# Altium PCB Juno_Light_Driver-Reference.PcbDoc
Units mm, origin at the board's own origin, x right, y up, seen from the top; angles counter-clockwise.
Board outline 60 x 60 mm, 2 copper layers (Top Layer, Bottom Layer); 29 components, 61 nets, 191 pads, 12 vias.
Unrouted connection lines stored in the file: 130.
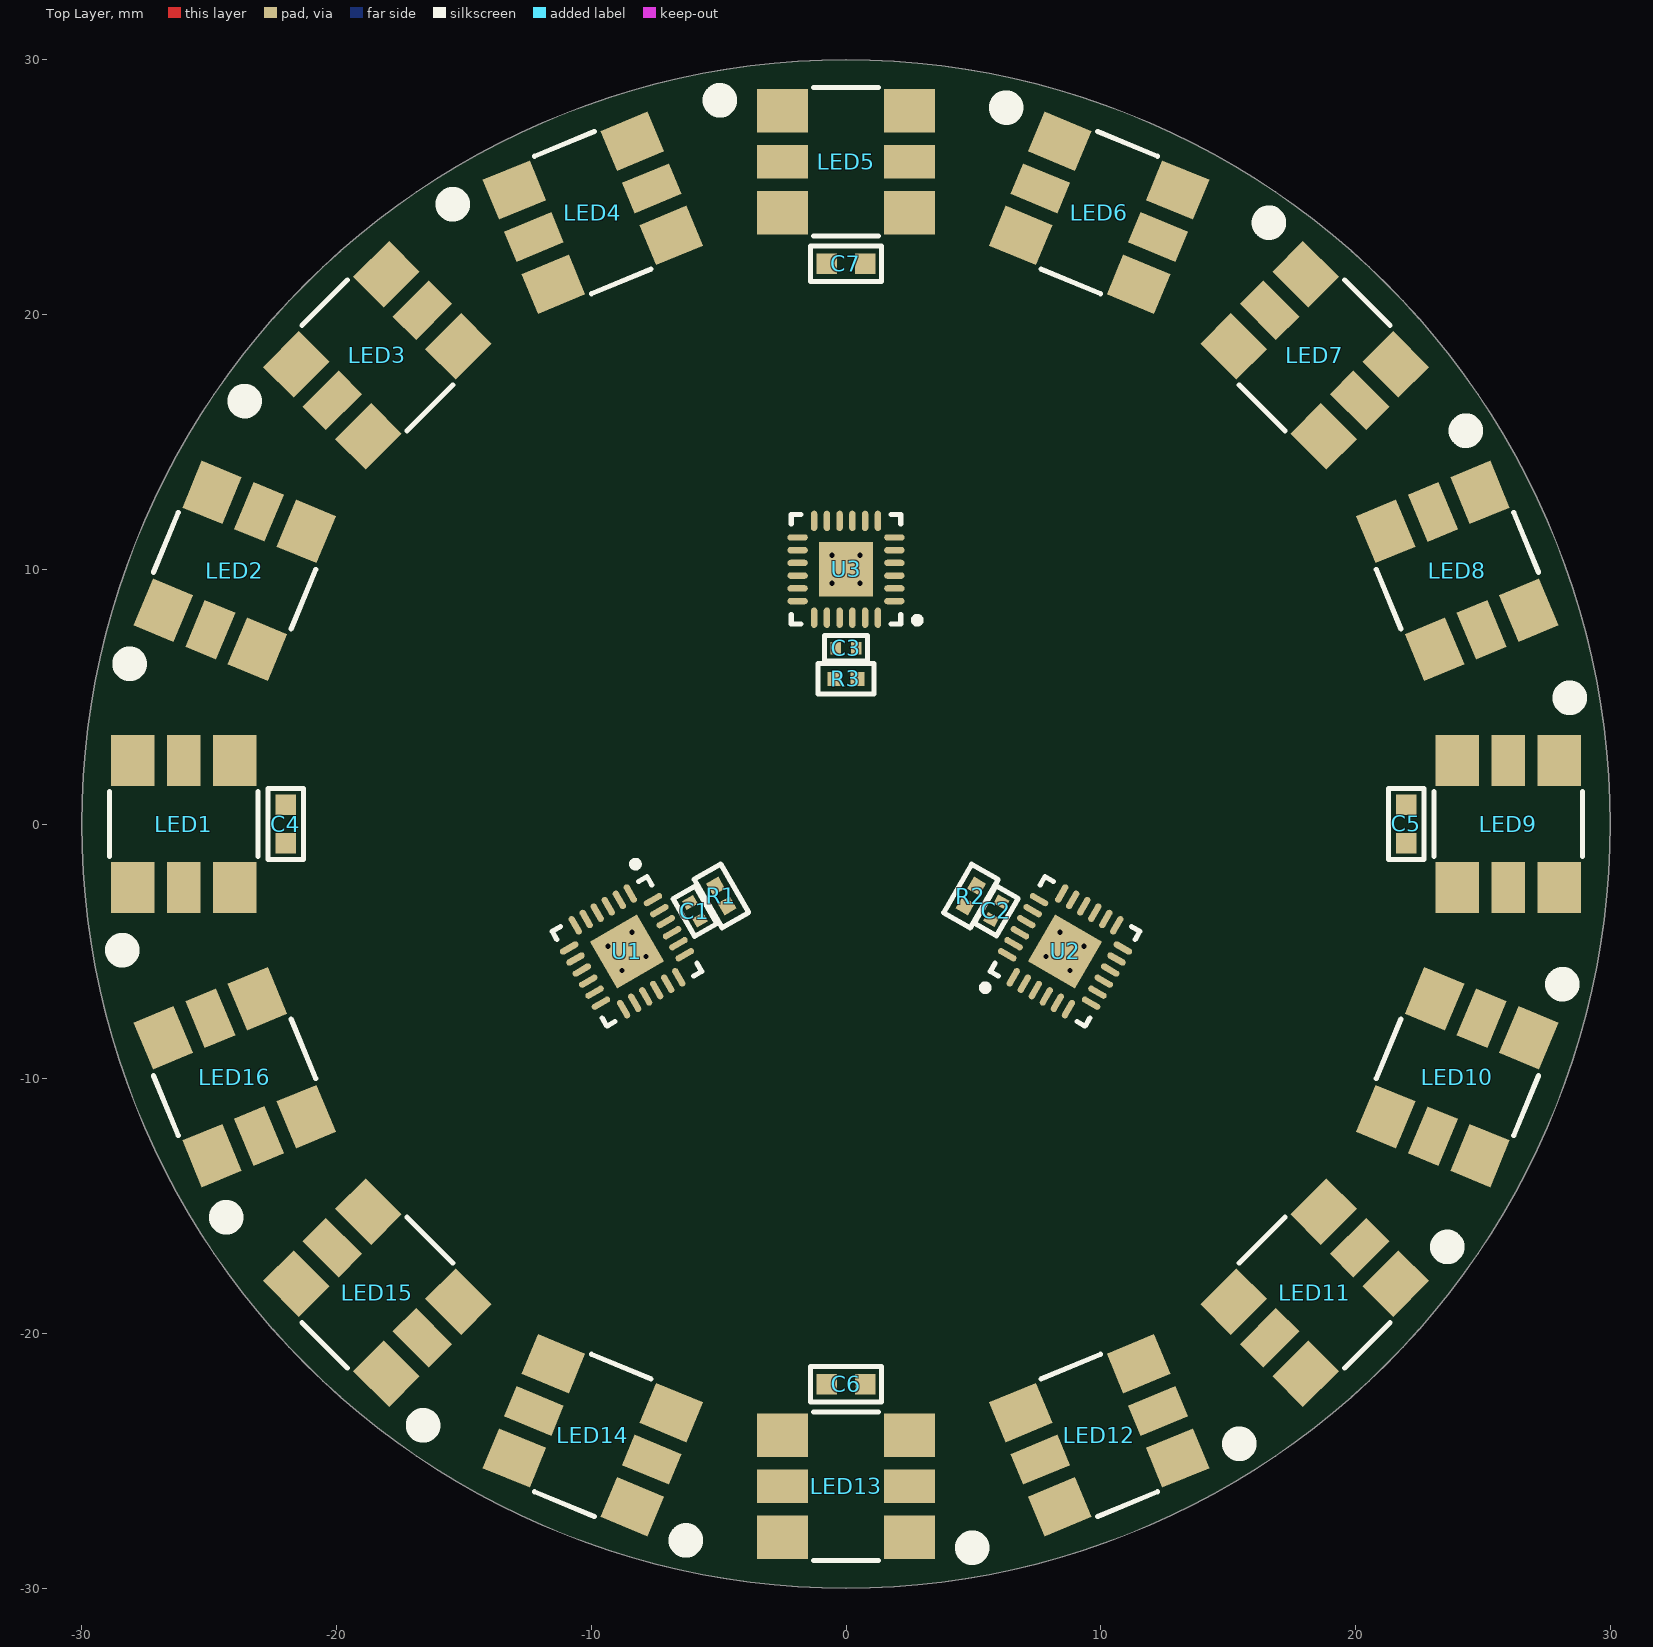
[diagram p0: Top Layer view]
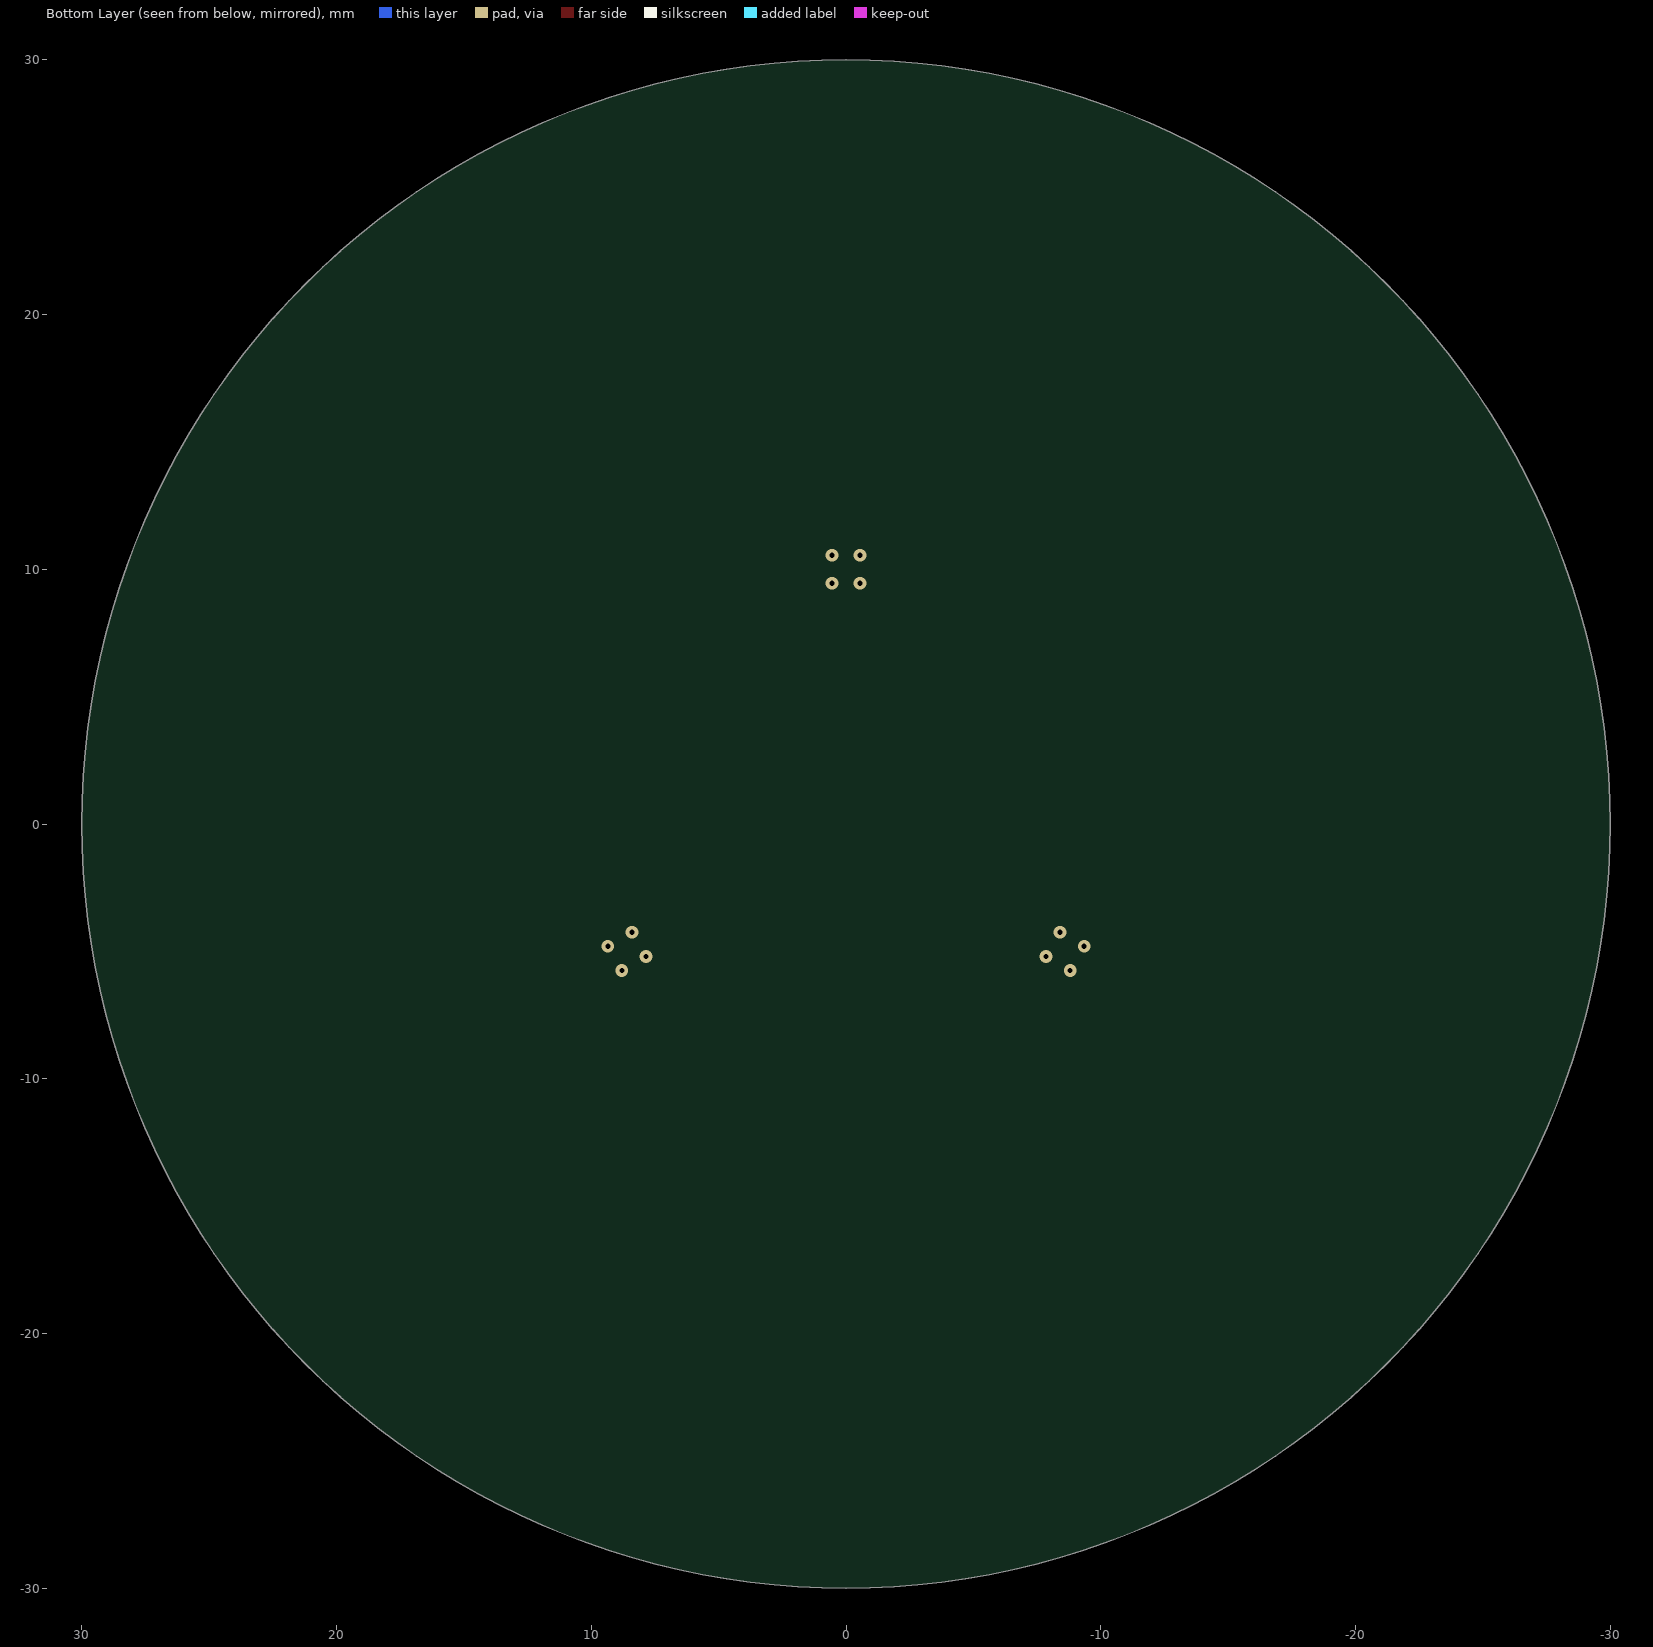
[diagram p1: Bottom Layer view, seen from below]

## Layer stack, top to bottom
Top Solder: solder mask 0.0102, Solder Resist, Dk 3.5
Top Layer: signal copper 0.0356
Dielectric 1: dielectric 0.32, FR-4, Dk 4.8
Bottom Layer: signal copper 0.0356
Bottom Solder: solder mask 0.0102, Solder Resist, Dk 3.5

## Board outline
-30,0 ccw(c0,0) 0,-30 ccw(c0,0) 30,0 ccw(c0,0) 0,30 ccw(c0,0)

## Design rules (kind name [scope] priority, off if disabled: settings)
Clearance [All] p1: gap=0.152 ignorepadtopadclearanceinfootprint=FALSE except(0: Arc-Hole Track-Hole SMDPad-Hole THPad-Hole Via-Hole Fill-Hole Poly-Hole Region-Hole Text-Hole)
MinimumSolderMaskSliver [All] p1 off: minsoldermaskwidth=0.254
PolygonConnect [All] p1: connectstyle=Direct reliefconductorwidth=0.254 reliefentries=4 polygonreliefangle="90 Angle" airgapwidth=0.254
RoutingVias [All] p1: holewidth=0.711 width=1.27 viastyle="Through Hole" minholewidth=0.2 minwidth=0.45 maxholewidth=0.711 maxwidth=1.27
SilkToSilkClearance [All] p1 off: silktosilkclearance=0.254
SilkToSolderMaskClearance [IsPad] p1 off: minsilkscreentomaskgap=0.254 clearancetoexposedcopper=TRUE
SolderMaskExpansion [All] p1: expansion=0.102
Width [All] p1: maxlimit=5.08 minlimit=0.152 preferedwidth=0.254 minimp=50.000000 maximp=50.000000 favimp=50.000000
27 further rules are at their usual default settings.

## Classes and differential pairs
component class "[02] - TRICOLOR LEDS": C4 C5 C6 LED1 LED2 LED3 LED4 LED5 LED6 LED7 LED8 LED9 LED10 LED11 LED12 LED13 LED14 LED15 LED16
component class "[01] - LED DRIVER": C1 C2 C3 R1 R2 R3 U1 U2 U3

## Components (designator, comment, footprint, x,y, rotation, side; value= is the part's Value field where it differs from the comment)
C1 "0.1uF" C0402 -5.932,-3.425 r120 top
C2 "0.1uF" C0402 5.9,-3.406 r240 top
C3 "0.1uF" C0402 0,6.9 r0 top
C4 "10uF" C0603 -22,0 r270 top
C5 "10uF" C0603 22,0 r90 top
C6 "10uF" C0603 0,-22 r0 top
C7 "10uF" C0603 0,22 r180 top
LED1 "SLV6A-FKB-CK1P1G1BB7R3R3" "CREE SLV6A-FKB" -26,0 r90 top
LED2 "SLV6A-FKB-CK1P1G1BB7R3R3" "CREE SLV6A-FKB" -24,9.941 r67.5 top
LED3 "SLV6A-FKB-CK1P1G1BB7R3R3" "CREE SLV6A-FKB" -18.4,18.4 r45 top
LED4 "SLV6A-FKB-CK1P1G1BB7R3R3" "CREE SLV6A-FKB" -9.941,24 r22.5 top
LED5 "SLV6A-FKB-CK1P1G1BB7R3R3" "CREE SLV6A-FKB" 0,26 r0 top
LED6 "SLV6A-FKB-CK1P1G1BB7R3R3" "CREE SLV6A-FKB" 9.941,24 r337.5 top
LED7 "SLV6A-FKB-CK1P1G1BB7R3R3" "CREE SLV6A-FKB" 18.4,18.4 r315 top
LED8 "SLV6A-FKB-CK1P1G1BB7R3R3" "CREE SLV6A-FKB" 24,9.941 r292.5 top
LED9 "SLV6A-FKB-CK1P1G1BB7R3R3" "CREE SLV6A-FKB" 26,0 r270 top
LED10 "SLV6A-FKB-CK1P1G1BB7R3R3" "CREE SLV6A-FKB" 24,-9.941 r247.5 top
LED11 "SLV6A-FKB-CK1P1G1BB7R3R3" "CREE SLV6A-FKB" 18.4,-18.4 r225 top
LED12 "SLV6A-FKB-CK1P1G1BB7R3R3" "CREE SLV6A-FKB" 9.941,-24 r202.5 top
LED13 "SLV6A-FKB-CK1P1G1BB7R3R3" "CREE SLV6A-FKB" 0,-26 r180 top
LED14 "SLV6A-FKB-CK1P1G1BB7R3R3" "CREE SLV6A-FKB" -9.941,-24 r157.5 top
LED15 "SLV6A-FKB-CK1P1G1BB7R3R3" "CREE SLV6A-FKB" -18.4,-18.4 r135 top
LED16 "SLV6A-FKB-CK1P1G1BB7R3R3" "CREE SLV6A-FKB" -24,-9.941 r112.5 top
R1 "18K" R0402 -4.893,-2.825 r300 top
R2 "18K" R0402 4.9,-2.829 r60 top
R3 "18K" R0402 0,5.7 r180 top
U1 "LED1642GWQTR" QFN24 -8.6,-5 r300 top
U2 "LED1642GWQTR" QFN24 8.6,-5 r60 top
U3 "LED1642GWQTR" QFN24 0,10 r180 top

## Footprints (in the part's own frame and the unit in brackets; to place one, negate y for a bottom-side part, rotate by r counter-clockwise, add the part's x,y. Pads: shape width x height; smd on the part's side, far side on the other; paste and mask are expansions set on the pad)
C0402 [mm] "Chip Capacitor, 2-Leads, Body 1.00x0.50mm, IPC Medium Density"
  rect 0.4x0.5 smd: 1(-0.4,0) 2(0.4,0)
  silkscreen extent -0.85,-0.5 0.85,0.5, body extent -0.52,-0.28 0.52,0.28, height 0.55
C0603 [mm] "Chip Capacitor, 2-Leads, Body 1.60x0.80mm, IPC Medium Density"
  rect 0.8x0.8 smd: 1(-0.75,0) 2(0.75,0)
  silkscreen extent -1.4,-0.7 1.4,0.7, body extent -0.85,-0.45 0.85,0.45, height 0.9
"CREE SLV6A-FKB" [mm]
  rect 2x1.7 smd: 1(-2.5,2) 3(-2.5,-2) 4(2.5,-2) 6(2.5,2)
  rect 2x1.3 smd: 2(-2.5,0) 5(2.5,0)
  silkscreen extent -5.13,-2.92 1.27,2.92, body extent -2.8,-2.8 2.8,2.8, height 2.6
QFN24 [mm] "QFN, 24-Leads, Body 3.93x3.93mm, Pitch 0.50mm, Thermal Pad 2.13x2.13mm, IPC High Density"
  oval 0.8x0.25 smd: 1(-1.9,1.25) 2(-1.9,0.75) 3(-1.9,0.25) 4(-1.9,-0.25) 5(-1.9,-0.75) 6(-1.9,-1.25) 13(1.9,-1.25) 14(1.9,-0.75) 15(1.9,-0.25) 16(1.9,0.25) 17(1.9,0.75) 18(1.9,1.25)
  oval 0.25x0.8 smd: 7(-1.25,-1.9) 8(-0.75,-1.9) 9(-0.25,-1.9) 10(0.25,-1.9) 11(0.75,-1.9) 12(1.25,-1.9) 19(1.25,1.9) 20(0.75,1.9) 21(0.25,1.9) 22(-0.25,1.9) 23(-0.75,1.9) 24(-1.25,1.9)
  rect 2.13x2.13 smd: 25(0,0)
  silkscreen extent -2.92,-2.15 2.15,2.15, body extent -2.05,-2.05 2.05,2.05, height 1
R0402 [mm] "Chip Resistor, 2-Leads, Body 1.00x0.50mm, IPC Medium Density"
  rect 0.55x0.55 smd: 1(-0.45,0) 2(0.45,0)
  silkscreen extent -1.1,-0.6 1.1,0.6, body extent -0.52,-0.28 0.52,0.28, height 0.4

## Part data
C1 C2 C3: library part CL05B104KO5NNNC, "Cap Ceramic 0.1uF 16V X7R 10% SMD 0402 125C C/T", Capacitance=100nF, Case/Package=0402, Case Code (Metric)=1005, Dielectric=X7R, Manufacturer 1=Samsung, Max Operating Temperature=125°C, Min Operating Temperature=-55°C, Package Quantity=1, Supplier Part Number 1=1276-1001-6-ND, Tolerance=10%, Voltage=16V, Case Code (Imperial)=0402, ComponentLink1Description=https://datasheet.ciiva.com/16208/cl05b104kq5nnnc-16208343.pdf, ComponentLink1URL=https://datasheet.ciiva.com/16208/cl05b104kq5nnnc-16208343.pdf, ComponentLink2Description=https://datasheet.ciiva.com/26920/getdatasheetpartid-359683-26920169.pdf, ComponentLink2URL=https://datasheet.ciiva.com/26920/getdatasheetpartid-359683-26920169.pdf, ComponentLink3Description=https://datasheet.ciiva.com/26309/mlcc-catalogdownload2013-eng-26309003.pdf, ComponentLink3URL=https://datasheet.ciiva.com/26309/mlcc-catalogdownload2013-eng-26309003.pdf, ComponentLink4Description=https://datasheet.ciiva.com/29198/458718-da-01-en-vs-kondensator-0402-29198423.pdf, ComponentLink4URL=https://datasheet.ciiva.com/29198/458718-da-01-en-vs-kondensator-0402-29198423.pdf, Contact Plating=Tin, Depth=0.5mm, Description 1="Cap Ceramic 0.1uF 16V X7R 10% SMD 0402 125C Paper T/R", Height=0.5mm, Lead Free="Lead Free", Length=1mm, Manufacturer Part Number 1=CL05B104KO5NNNC, Material=Ceramic, Mount="Surface Mount", Packaging="Tape and Reel", Pricing 1="1=0.1, 10=0.018, 100=0.0081, 500=0.0058, 1000=0.0045, 2500=0.0041, 5000=0.0038 (USD)", Radiation Hardening=No, Stock 1=9531, Supplier 1=Digi-Key, Thickness=0.022inch, Voltage Rating=16V, Voltage Rating (DC)=16V, Width=0.02inch
C4 C5 C6 C7: library part GRM188R61A106KE69D, "Cap Ceramic 10uF 10V X5R 10% SMD 0603 85C Paper T/R", Case/Package=0603, Case Code (Metric)=1608, Dielectric=X5R, Manufacturer=Murata, Max Operating Temperature=85°C, Min Operating Temperature=-55°C, Supplier Part Number 1=490-10474-1-ND, Tolerance=10%, Voltage=10V, Capacitance=10uF, Case Code (Imperial)=0603, Depth=0.8mm, Description 1="Cap Ceramic 10uF 10V X5R 10% SMD 0603 85C Paper T/R", Height=0.8mm, Lead Free="Lead Free", Length=1.6mm, Manufacturer Part Number 1=GRM188R61A106KE69D, Mount="Surface Mount", Packaging="Tape and Reel", Pricing="1=0.22, 10=0.149, 100=0.0754, 500=0.05158, 1000=0.04563 (USD)", REACH SVHC="No SVHC", Stock=40000, Supplier 1=Digi-Key, Thickness=0.037inch, Voltage Rating=10V, Voltage Rating (DC)=10V, Width=0.031inch
LED1 LED2 LED3 LED4 LED5 LED6 LED7 LED8 LED9 LED10 LED11 LED12 LED13 LED14 LED15 LED16: "LED RGB 6PLCC SMD", Case/Package=SMD/SMT, Color=Blue,Green,Red, Forward Voltage=3.2V, Manufacturer=Cree, Supplier Part Number 1=SLV6A-FKB-CK1P1G1BB7R3R3CT-ND, Test Current=20mA, Dominant Wavelength=470nm, Height=2.6mm, Length=5.5mm, Luminous Intensity=420mcd, Manufacturer Part Number=SLV6A-FKB-CK1P1G1BB7R3R3, Mount="Surface Mount", Packaging="Tape and Reel", Pricing 1="1=0.42, 10=0.395, 100=0.3648, 1000=0.32631 (USD)", Stock 1=101474, Supplier 1=Digi-Key, Width=5.3mm
R1 R2 R3: library part CRGCQ0402F18K, Manufacturer="TE Connectivity", Supplier Part Number 1=A129642CT-ND, Manufacturer Part Number=CRGCQ0402F18K, Pricing 1="1=0.1, 10=0.022, 100=0.009, 1000=0.00406, 2500=0.00352, 5000=0.00291 (USD)", Stock 1=128806, Supplier 1=Digi-Key
U1 U2 U3: "IC LED DRIVER LIN DIM 40MA 24QFN", Case/Package=QFN, Frequency=30MHz, Manufacturer=STMicroelectronics, Max Input Voltage=5.5V, Max Operating Temperature=85°C, Max Output Current=50mA, Max Output Voltage=19V, Max Supply Current=10mA, Min Input Voltage=3V, Min Operating Temperature=-40°C, Nominal Input Voltage (DC)=3.3V, Output Current per Channel=40mA, Package Quantity=4000, Supplier Part Number 1=497-14029-1-ND, ComponentLink1Description=http://www.st.com/content/ccc/resource/technical/document/datasheet/ae/9b/e2/7c/7d/66/41/08/DM00080246.pdf/files/DM00080246.pdf/jcr:content/translations/en.DM00080246.pdf?src-supplier=Digi-Key, ComponentLink1URL=http://www.st.com/content/ccc/resource/technical/document/datasheet/ae/9b/e2/7c/7d/66/41/08/DM00080246.pdf/files/DM00080246.pdf/jcr:content/translations/en.DM00080246.pdf?src-supplier=Digi-Key, ComponentLink2Description=https://www.verical.com/server-webapp/html/getDatasheet?partID=789956&src-supplier=Verical, ComponentLink2URL=https://www.verical.com/server-webapp/html/getDatasheet?partID=789956&src-supplier=Verical, ComponentLink3Description=http://www.st.com/web/en/resource/technical/document/datasheet/DM00080246.pdf?src-supplier=Avnet, ComponentLink3URL=http://www.st.com/web/en/resource/technical/document/datasheet/DM00080246.pdf?src-supplier=Avnet, Dimming=PWM, Height=0.95mm, Lead Free="Lead Free", Length=4.15mm, Manufacturer Part Number=LED1642GWQTR, Max Input Voltage (DC)=5.5V, Max Supply Voltage=5.5V, Min Input Voltage (DC)=3V, Min Supply Voltage=3V, Mount="Surface Mount", Nominal Supply Current=10mA, Number of Channels=16, Number of Outputs=16, Number of Pins=24, Operating Supply Voltage=3.3V, Output Current=50mA, Output Voltage=19V, Packaging="Tape and Reel", Pricing 1="1=2.1, 10=1.883, 100=1.5138, 500=1.24372, 1000=1.03052 (USD)", Radiation Hardening=No, REACH SVHC="No SVHC", Stock 1=43999, Supplier 1=Digi-Key, Switching Frequency=30MHz, Width=4.15mm

## Via types
v1: diameter 0.5, hole 0.2, Top Layer to Bottom Layer, 12 vias

## Nets (pads, with @x,y where several pads share a name; then routed paths per layer and width w, separated by ;. In a path a pad name is that pad's centre, name@x,y a point inside that pad or via, vN(x,y) a via of type N, cw(c..) or ccw(c..) an arc to the next point about the centre after c; other vN are vias at no path point)
+3V3: C1.1 C2.1 C3.1 U1.21 U2.21 U3.21
+VBATT: C4.1 C5.1 C6.1 C7.1 LED1.4 LED1.5 LED1.6 LED2.4 LED2.5 LED2.6 LED3.4 LED3.5 LED3.6 LED4.4 LED4.5 LED4.6 LED5.4 LED5.5 LED5.6 LED6.4 LED6.5 LED6.6 LED7.4 LED7.5 LED7.6 LED8.4 LED8.5 LED8.6 LED9.4 LED9.5 LED9.6 LED10.4 LED10.5 LED10.6 LED11.4 LED11.5 LED11.6 LED12.4 LED12.5 LED12.6 LED13.4 LED13.5 LED13.6 LED14.4 LED14.5 LED14.6 LED15.4 LED15.5 LED15.6 LED16.4 LED16.5 LED16.6
CLK: U1.24 U2.24 U3.24
GND: C1.2 C2.2 C3.2 C4.2 C5.2 C6.2 C7.2 R1.1 R2.1 R3.1 U1.22 U1.25 U2.22 U2.25 U3.22 U3.25
  other v1: -8.801,-5.751 8.801,-5.751 -7.849,-5.201 7.849,-5.201 -9.351,-4.799 9.351,-4.799 -8.399,-4.249 8.399,-4.249 -0.55,9.45 0.55,9.45 -0.55,10.55 0.55,10.55
LE: U1.1 U2.1 U3.1
NetR1_2: R1.2 U1.20
NetR2_2: R2.2 U2.20
NetR3_2: R3.2 U3.20
NetU1_19: U1.19 U2.23
NetU2_19: U2.19 U3.23
OUTB0: LED1.1 U3.2
OUTB1: LED5.1 U3.3
OUTB2: LED9.1 U3.4
OUTB3: LED13.1 U3.5
OUTB4: LED2.1 U3.6
OUTB5: LED6.1 U3.7
OUTB6: LED10.1 U3.8
OUTB7: LED14.1 U3.9
OUTB8: LED3.1 U3.10
OUTB9: LED7.1 U3.11
OUTB10: LED11.1 U3.12
OUTB11: LED15.1 U3.13
OUTB12: LED4.1 U3.14
OUTB13: LED8.1 U3.15
OUTB14: LED12.1 U3.16
OUTB15: LED16.1 U3.17
OUTG0: LED1.2 U2.2
OUTG1: LED5.2 U2.3
OUTG2: LED9.2 U2.4
OUTG3: LED13.2 U2.5
OUTG4: LED2.2 U2.6
OUTG5: LED6.2 U2.7
OUTG6: LED10.2 U2.8
OUTG7: LED14.2 U2.9
OUTG8: LED3.2 U2.10
OUTG9: LED7.2 U2.11
OUTG10: LED11.2 U2.12
OUTG11: LED15.2 U2.13
OUTG12: LED4.2 U2.14
OUTG13: LED8.2 U2.15
OUTG14: LED12.2 U2.16
OUTG15: LED16.2 U2.17
OUTR0: LED1.3 U1.2
OUTR1: LED5.3 U1.3
OUTR2: LED9.3 U1.4
OUTR3: LED13.3 U1.5
OUTR4: LED2.3 U1.6
OUTR5: LED6.3 U1.7
OUTR6: LED10.3 U1.8
OUTR7: LED14.3 U1.9
OUTR8: LED3.3 U1.10
OUTR9: LED7.3 U1.11
OUTR10: LED11.3 U1.12
OUTR11: LED15.3 U1.13
OUTR12: LED4.3 U1.14
OUTR13: LED8.3 U1.15
OUTR14: LED12.3 U1.16
OUTR15: LED16.3 U1.17
PWCLK: U1.18 U2.18 U3.18
SDI: U1.23
SDO: U3.19

## Silkscreen, mask and mechanical layers (free items; w line width, h text height)
Mechanical 1:
  circle w1: c0,0 r30
Mechanical 2:
  lines w0.406: -30,0 30,0 ; -27.716,-11.481 27.716,11.481 ; -27.716,11.481 27.716,-11.481 ; -21,-21 21,21 ; -21,21 21,-21 ; -11.481,-27.716 11.481,27.716 ; -11.481,27.716 11.481,-27.716 ; 0,-30 0,30
Mechanical 3:
  lines w0.406: -25.981,-15 0,0 ; 0,30 0,0 ; 25.981,-15 0,0
Mechanical 4:
  lines w0.406: -30,0 30,0 ; 0,-30 0,30